# Altium PCB 温控.PcbDoc
Units mm, origin at the board's own origin, x right, y up, seen from the top; angles counter-clockwise.
Board outline 152.4 x 101.6 mm, 2 copper layers (Top Layer, Bottom Layer); 30 components, 29 nets, 132 pads, 31 vias.
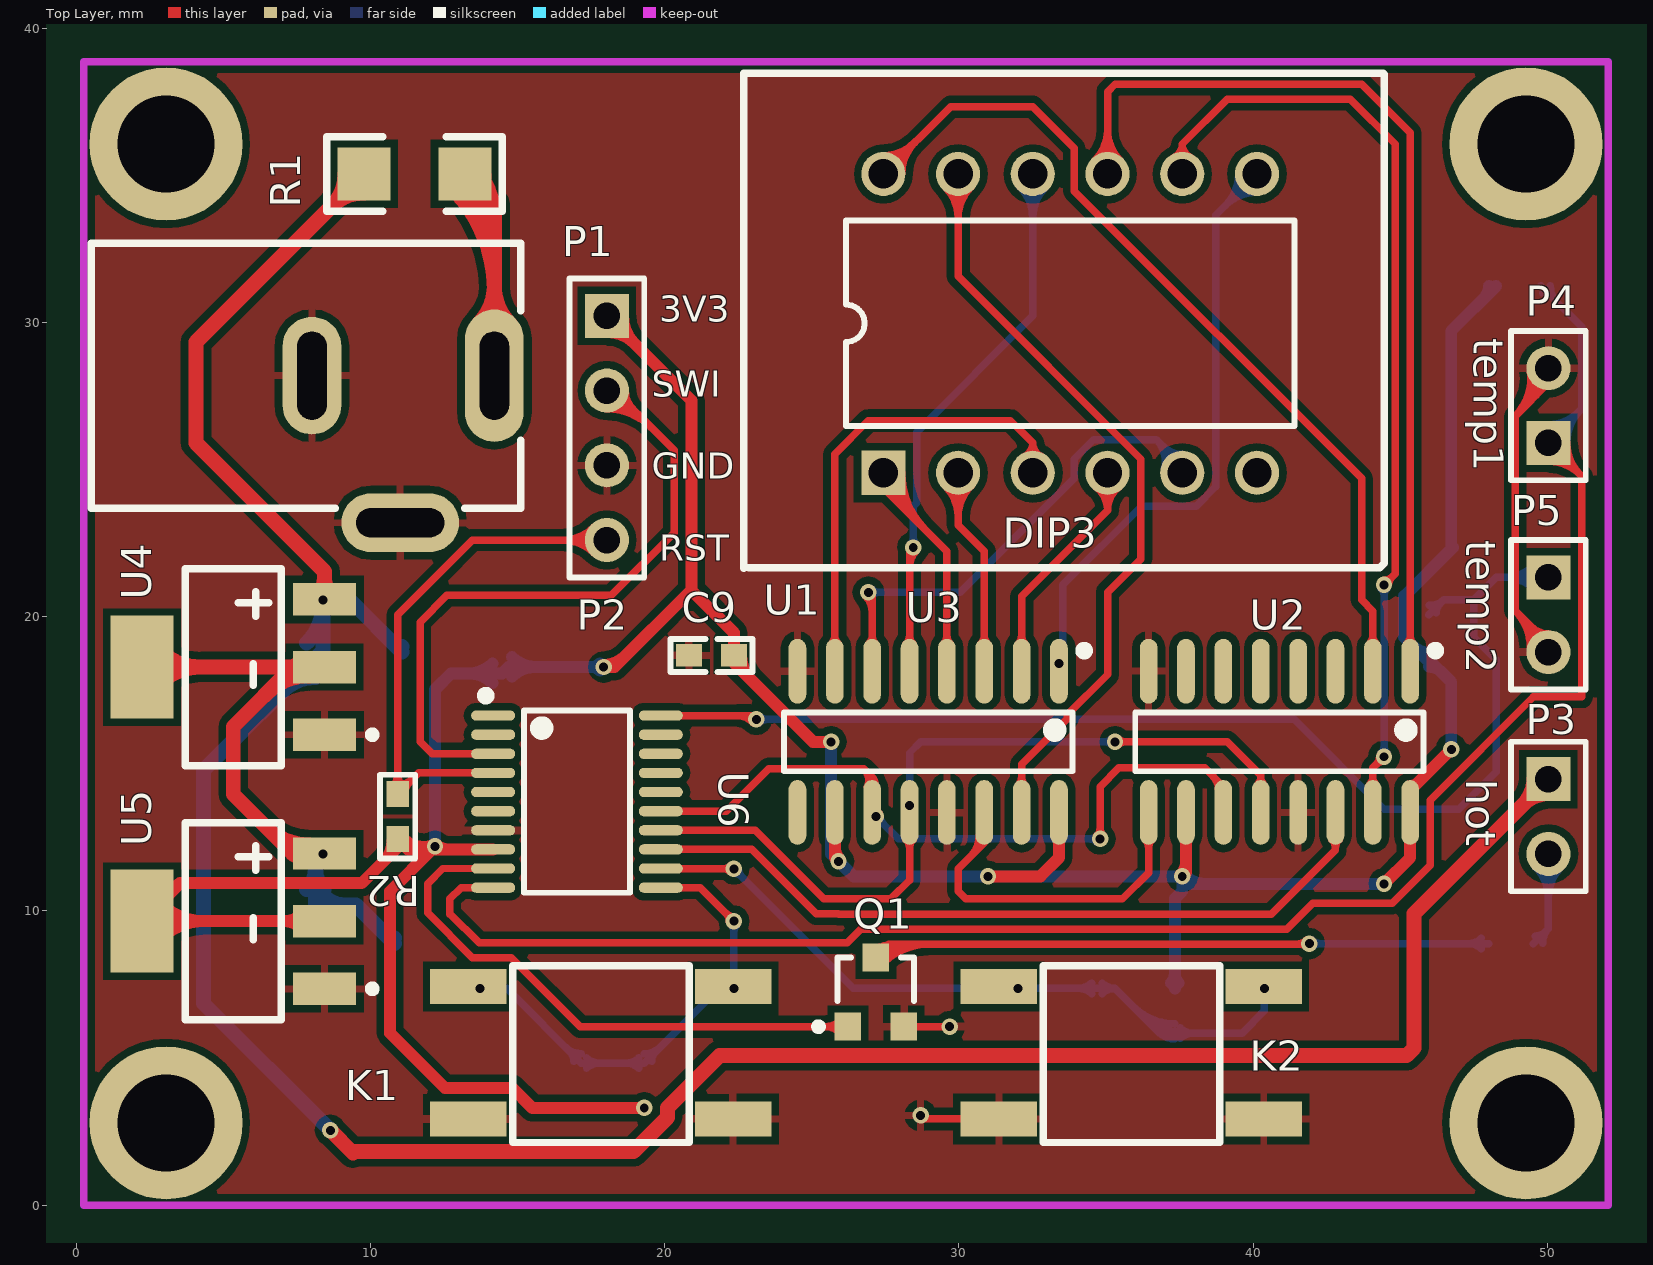
[diagram p0: Top Layer view]
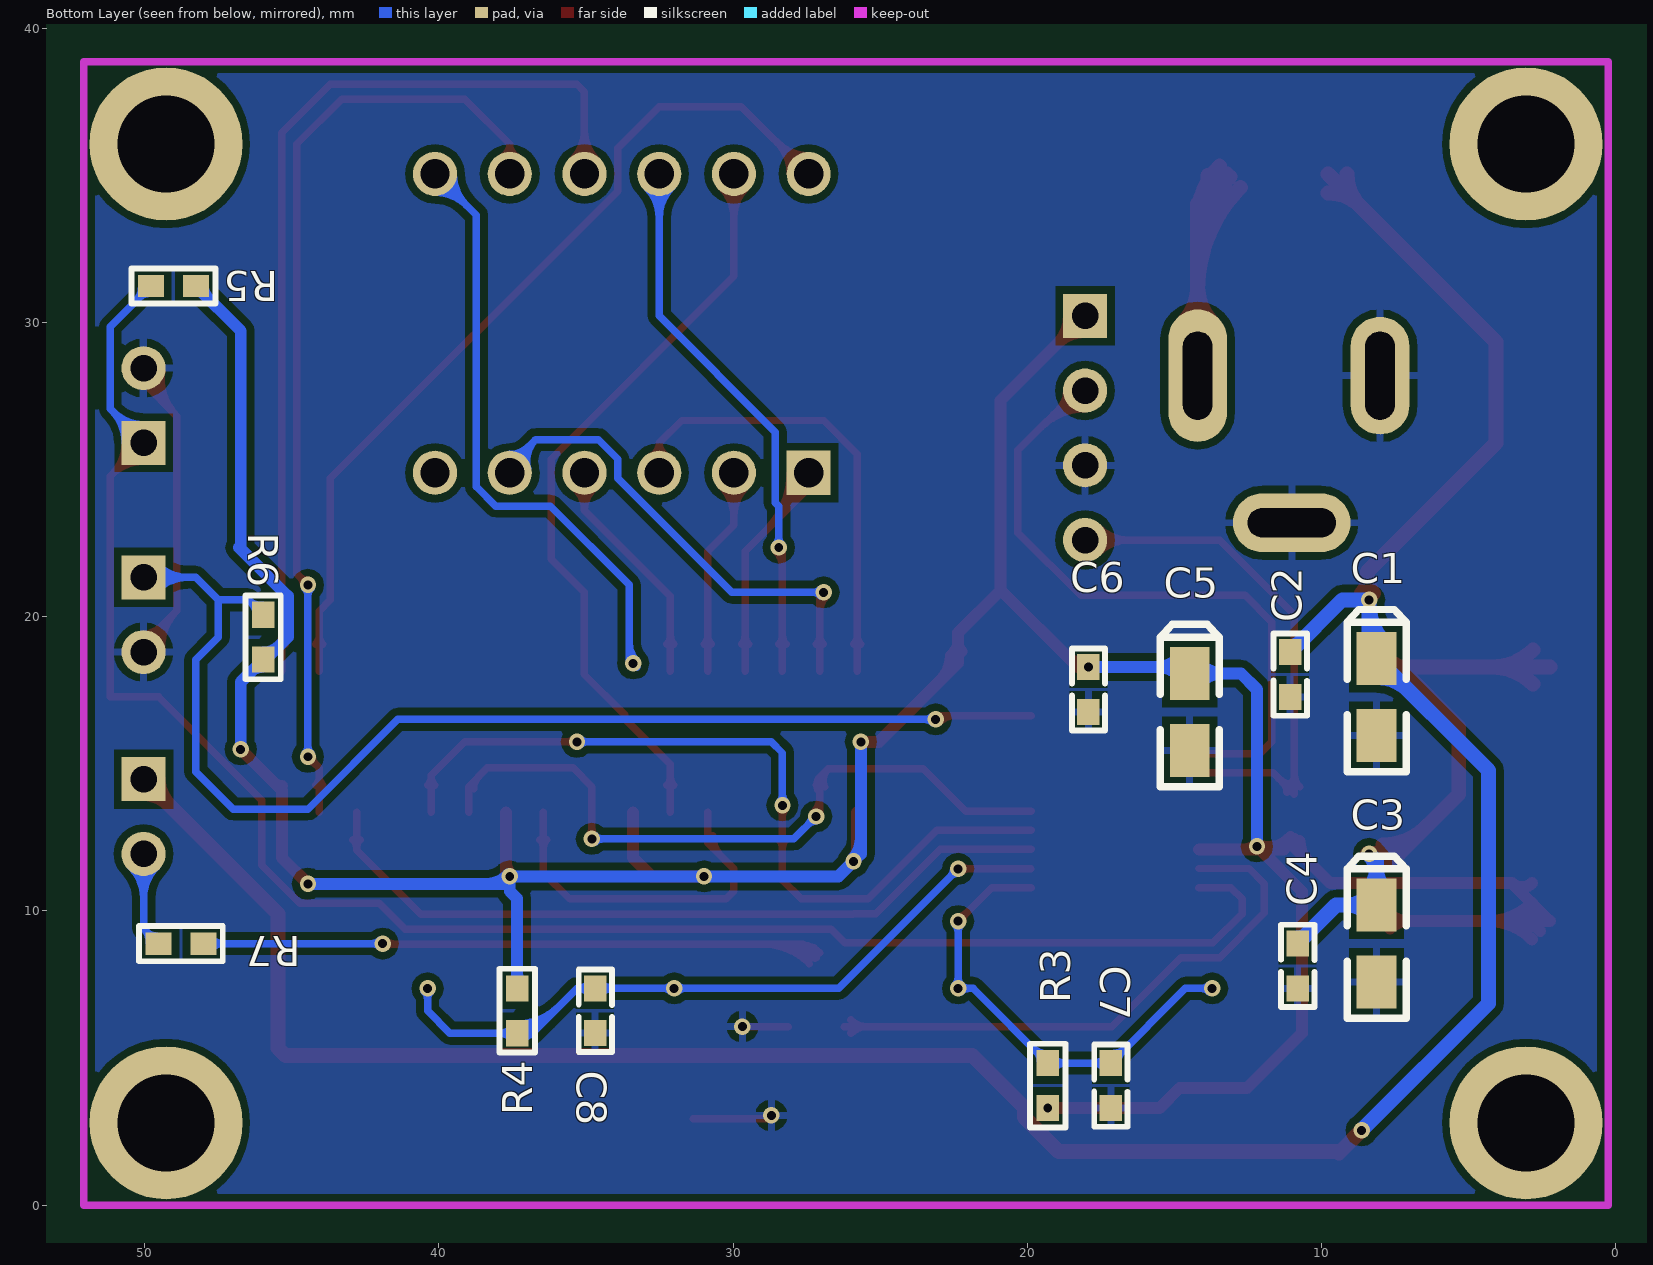
[diagram p1: Bottom Layer view, seen from below]

## Layer stack, top to bottom
Top Layer: signal copper 0.0356
Dielectric: dielectric 0.32, FR-4, Dk 4.8
Bottom Layer: signal copper 0.0356

## Board outline
-16.129,-10.414 136.271,-10.414 136.271,91.186 -16.129,91.186

## Design rules (kind name [scope] priority, off if disabled: settings)
Clearance [All] p1: gap=0.254
HoleToHoleClearance [All] p1: gap=0 allowstackedmicrovias=TRUE
MinimumSolderMaskSliver [All] p1: minsoldermaskwidth=0
PolygonConnect [All] p1: connectstyle=Relief reliefconductorwidth=0.254 reliefentries=4 polygonreliefangle="90 Angle" airgapwidth=0.254
RoutingVias [All] p1: holewidth=0.305 width=0.559 viastyle="Through Hole" minholewidth=0.305 minwidth=0.559 maxholewidth=0.305 maxwidth=0.559
SilkToSilkClearance [All] p1: silktosilkclearance=0
SilkToSolderMaskClearance [IsPad] p1: minsilkscreentomaskgap=0 clearancetoexposedcopper=TRUE
SolderMaskExpansion [All] p1: expansion=0.102
Width D12V0 [InNet('D12V0')] p1: maxlimit=1.016 minlimit=0.508 preferedwidth=0.762
Width D3V3 [InNet('D3V3')] p2: maxlimit=0.762 minlimit=0.406 preferedwidth=0.508
Width [All] p3: maxlimit=0.762 minlimit=0.254 preferedwidth=0.254
24 further rules are at their usual default settings.

## Classes and differential pairs
component class 温控: C1 C2 C3 C4 C5 C6 C7 C8 C9 K1 K2 P1 P2 P3 P4 P5 Q1 R1 R2 R3 R4 R5 R6 R7 U4 U5 U6
component class 显示: U1 U2 U3

## Components (designator, comment, footprint, x,y, rotation, side; value= is the part's Value field where it differs from the comment)
C1 "CAP" A_3216 8.128,17.272 r90 bottom
C2 "Cap" 0603_cap 11.176,18.034 r90 bottom
C3 "CAP" A_3216 8.128,8.89 r90 bottom
C4 "Cap" 0603_cap 10.922,8.128 r90 bottom
C5 "CAP" A_3216 14.478,16.764 r90 bottom
C6 "Cap" 0603_cap 18.034,17.526 r90 bottom
C7 "Cap" 0603_cap 17.272,4.064 r90 bottom
C8 "Cap" 0603_cap 34.798,6.604 r90 bottom
C9 "Cap" 0603_cap 21.59,18.796 r0 top
K1 "KEY_4" KEY6*6 20.828,8.128 r180 top
K2 "KEY_4" KEY6*6 38.862,8.128 r180 top
P1 "SOURCE" source 0.508,28.194 r0 top
P2 "STLINK" HDR1X4 18.034,30.226 r270 top
P3 "RHOT" HDR1X2 50.038,14.478 r270 top
P4 "TEMP1" HDR1X2 50.038,25.908 r90 top
P5 "TEMP1" HDR1X2 50.038,21.336 r270 top
Q1 "S8050" SOT-23R 27.178,7.112 r0 top
R1 "0" 1206 13.208,35.052 r180 top
R2 "103" 0603 10.922,13.97 r270 top
R3 "103" 0603 19.304,4.826 r270 bottom
R4 "103" 0603 37.338,5.842 r90 bottom
R5 "103" 0603 49.784,31.242 r180 bottom
R6 "103" 0603 45.974,20.066 r270 bottom
R7 "0" 0603 48.006,8.89 r0 bottom
U1 "DIP3" DIP3 27.432,24.892 r90 top
U2 "74HC595" LC-SOP-16_150mil 40.894,15.748 r180 top
U3 "74HC595" LC-SOP-16_150mil 28.956,15.748 r180 top
U4 "AMS1117-5.0" SOT223 5.334,18.288 r90 top
U5 "AMS1117-3.3" SOT223 5.334,9.652 r90 top
U6 "STM8L051F3P6" LC-TSSOP-20 17.018,13.716 r270 top

## Footprints (in the part's own frame and the unit in brackets; to place one, negate y for a bottom-side part, rotate by r counter-clockwise, add the part's x,y. Pads: shape width x height; smd on the part's side, far side on the other; paste and mask are expansions set on the pad)
0603 [mil]
  rect 35x30 smd: 1(0,0) 2(60,0)
  silkscreen extent -26,-24 86,24, body extent -22,-19 82,19, height 39
0603_cap [mil]
  rect 35x30 smd: 1(-29.92,-4.33) 2(30.08,-4.33)
  silkscreen extent -55,-27 55,18
1206 [mm]
  rect 1.8x1.8 smd: 1(0,0) 2(3.429,0)
  silkscreen extent -1.27,-1.27 4.7,1.27
A_3216 [mm]
  rect 1.8x1.35 smd: 1(1.31,0) 2(-1.31,0)
  silkscreen extent -2.54,-1 2.97,1, body extent -1.7,-0.84 1.7,0.84, height 1.71
DIP3 [mm]
  rect 1.5x1.5 hole 1: 1(0,0)
  round 1.5 hole 1: 2(0,-2.54) 3(0,-5.08) 4(0,-7.62) 5(0,-10.16) 6(0,-12.7) 7(10.16,-12.7) 8(10.16,-10.16) 9(10.16,-7.62) 10(10.16,-5.08) 11(10.16,-2.54) 12(10.16,0)
  silkscreen extent -3.25,-17.03 13.57,4.75
HDR1X2 [mm]
  rect 1.5x1.5 hole 0.9: 1(0,0)
  round 1.5 hole 0.9: 2(2.54,0)
  silkscreen extent -1.27,-1.27 3.81,1.27
HDR1X4 [mm] "Connector; Header; 4 Position"
  rect 1.5x1.5 hole 0.9: 1(0,0)
  round 1.5 hole 0.9: 2(2.54,0) 3(5.08,0) 4(7.62,0)
  silkscreen extent -1.27,-1.27 8.89,1.27
KEY6*6 [mm]
  rect 2.6x1.2 smd: 1(-1.5,5.2) 1(7.5,5.2) 2(-1.5,0.7) 2(7.5,0.7)
  silkscreen extent 0,0 6,6
LC-SOP-16_150mil [mm]
  oval 0.6x2.2 smd: 1(-4.445,-2.4) 2(-3.175,-2.4) 3(-1.905,-2.4) 4(-0.635,-2.4) 5(0.635,-2.4) 6(1.905,-2.4) 7(3.175,-2.4) 8(4.445,-2.4) 9(4.445,2.4) 10(3.175,2.4) 11(1.905,2.4) 12(0.635,2.4) 13(-0.635,2.4) 14(-1.905,2.4) 15(-3.175,2.4) 16(-4.445,2.4)
  silkscreen extent -5.45,-3.25 4.9,1
LC-TSSOP-20 [mm]
  oval 0.35x1.5 smd: 1(-2.925,-2.85) 2(-2.275,-2.85) 3(-1.625,-2.85) 4(-0.975,-2.85) 5(-0.325,-2.85) 6(0.325,-2.85) 7(0.975,-2.85) 8(1.625,-2.85) 9(2.275,-2.85) 10(2.925,-2.85) 11(2.925,2.85) 12(2.275,2.85) 13(1.625,2.85) 14(0.975,2.85) 15(0.325,2.85) 16(-0.325,2.85) 17(-0.975,2.85) 18(-1.625,2.85) 19(-2.275,2.85) 20(-2.925,2.85)
  silkscreen extent -3.75,-3.25 3.1,1.8
SOT223 [mm]
  rect 1.1x2.15 smd: 1(-2.3,-3.1) 2(0,-3.1) 3(2.3,-3.1)
  rect 3.5x2.15 smd: 2(0,3.1)
  silkscreen extent -3.35,-4.85 3.35,1.62, body extent -3.35,-1.62 3.35,1.62, height 1
SOT-23R [mm]
  rect 0.9x0.95 smd: 1(0.95,-1.048) 2(-0.95,-1.048) 3(0,1.302)
  silkscreen extent -2.07,-1.17 1.3,1.3
source [mm] "DC Power Jack, 2.5mm, KLD Series, PCB Mount"
  oval 2x4.5 hole 1 slot 3 at 90 deg: 1(13.7,0)
  oval 2x4 hole 1 slot 3 at 90 deg: 2(7.5,0)
  oval 4x2 hole 1 slot 3 at 0 deg: 3(10.5,-5)
  silkscreen extent 0,-4.5 14.6,4.5, body extent -0.13,-4.63 14.73,4.63, height 6

## Part data
C1 C3 C5: library part CAP2
C2 C4 C6 C7 C8 C9: "Capacitor"
K1 K2: "Switch"
P2: library part "Header 4", "Header, 4-Pin"
P3 P4 P5: library part "Header 2", "Header, 2-Pin"
Q1: library part NPN, "8050/BCW846/BCW847"
R1 R2 R3 R4 R5 R6 R7: library part RES, "Resistor"
U4 U5: library part AMS1117, "3.3V电压转换器AMS1117"

## Free pads (board coordinates)
  round 5.2 hole 3.3: 0(3.048,36.068) 1(3.048,2.794) 2(49.276,36.068) 3(49.276,2.794)

## Via types
v1: diameter 0.559, hole 0.305, Top Layer to Bottom Layer, 31 vias

## Nets (pads, with @x,y where several pads share a name; then routed paths per layer and width w, separated by ;. In a path a pad name is that pad's centre, name@x,y a point inside that pad or via, vN(x,y) a via of type N, cw(c..) or ccw(c..) an arc to the next point about the centre after c; other vN are vias at no path point)
A: U1.11 U3.15 | length 30.4
  Top Layer w0.254: U1.11@29.531,34.611 cw(c28.468,33.548) 29.972,33.548 cw(c31.476,33.548) U1.11@30.413,34.611 ; U1.11@29.711,34.791 cw(c29.081,34.161) 29.972,34.161 cw(c30.863,34.161) U1.11@30.233,34.791 ; U1.11 29.972,31.571 36.183,25.36 36.183,21.959 35.052,20.828 35.052,18.036 33.683,16.667 33.683,16.538 32.131,14.986 U3.15 ; U3.15@32.009,14.27 ccw(c31.713,14.566) 32.131,14.566 ccw(c32.549,14.566) U3.15@32.253,14.27
B: U1.7 U3.1 | length 25.1
  Bottom Layer w0.254: v1@33.274,18.288 33.528,18.542 33.528,21.082 36.207,23.761 38.06,23.761 38.723,24.424 38.723,33.643 U1.7 ; v1@33.293,18.523 ccw(c32.726,19.09) 33.528,19.09 ; U1.7@39.509,35.052 cw(c38.005,35.052) 39.068,33.988 cw(c40.132,32.925) U1.7@40.132,34.429 ; U1.7@39.763,35.052 cw(c38.872,35.052) 39.502,34.422 cw(c40.132,33.792) U1.7@40.132,34.683
  other v1: 33.401,18.415
C: U1.4 U3.2 | length 11.5
  Top Layer w0.254: U3.2@32.009,19.07 ccw(c31.713,19.366) 32.131,19.366 ccw(c32.549,19.366) U3.2@32.253,19.07 ; U3.2 32.131,20.701 35.052,23.622 ; U1.4@34.671,24.399 cw(c34.069,23.622) 35.052,23.622 ; U1.4@34.826,24.6 cw(c34.47,24.14) 35.052,24.14 cw(c35.634,24.14) U1.4@35.278,24.6 ; U1.4 35.052,23.622 ; U1.4@35.433,24.399 ccw(c36.035,23.622) 35.052,23.622
D: U1.2 U3.3 | length 11.5
  Top Layer w0.254: U1.2@29.531,24.451 cw(c28.468,23.388) 29.972,23.388 cw(c31.476,23.388) U1.2@30.413,24.451 ; U1.2@29.711,24.631 cw(c29.081,24.001) 29.972,24.001 cw(c30.863,24.001) U1.2@30.233,24.631 ; U1.2 29.972,23.114 30.861,22.225 U3.3 ; U3.3@30.739,19.07 ccw(c30.443,19.366) 30.861,19.366 ccw(c31.279,19.366) U3.3@30.983,19.07
D3V3: C5.1 C6.2 C9.2 P2.1 R2.2 R3.2 R4.2 R5.2 R6.2 U2.10 U2.16 U3.10 U3.16 U5.2 U6.8 | length 152.2
  Top Layer w0.406: U5.2@2.563,9.323 cw(c3.358,8.528) 3.358,9.652 cw(c3.358,10.776) U5.2@2.563,9.981 ; U5.2@2.85,9.036 cw(c4.339,7.547) 4.339,9.652 cw(c4.339,11.757) U5.2@2.85,10.268 ; U5.2@2.85,10.944 ccw(c3.188,11.284) 3.527,10.945 ; U5.2@7.664,9.407 ccw(c7.072,8.815) 7.072,9.652 ccw(c7.072,10.489) U5.2@7.664,9.897 ; U5.2@8.434,9.652 2.234,9.652 3.527,10.945 ; 10.467,11.714 ccw(c9.798,12.383) R2.2@10.744,12.383 ; R2.2@11.048,12.508 ccw(c12.055,13.515) v1@12.055,12.091 ; 11.67,12.194 ccw(c11.835,12.811) v1@12.154,12.258 ; 11.764,12.091 ccw(c11.764,12.62) v1@12.138,12.246 ; v1@12.246,12.246 ccw(c12.62,12.62) 12.62,12.091 ; U6.8 v1@12.091,12.091 ; v1(17.924,18.29) 18.29,18.29 20.904,20.904 ; v1@17.924,18.366 ccw(c17.924,19.434) 18.679,18.679 ; P2.1@18.034,29.679 cw(c18.034,28.359) 18.967,29.293 cw(c19.901,30.226) P2.1@18.581,30.226 ; P2.1 20.904,27.356 20.904,20.904 ; v1(19.304,3.302) 15.501,3.302 14.817,3.985 12.525,3.985 10.668,5.842 10.668,10.668 v1@12.091,12.091 ; C9.2@22.228,18.812 ccw(c21.925,19.115) 22.354,19.115 ccw(c22.783,19.115) C9.2@22.48,18.812 ; C9.2@22.595,18.686 ccw(c23.786,18.686) 22.944,17.844 ; v1(25.654,15.748) 25.04,15.748 22.354,18.434 C9.2 22.354,19.454 20.904,20.904 ; 25.781,12.175 ccw(c26.399,12.175) v1@25.962,11.738 ; U3.10 25.781,11.811 v1(25.908,11.684) ; v1(30.988,11.176) 32.766,11.176 33.401,11.811 U3.16 ; v1@37.538,11.23 ccw(c37.101,11.667) 37.719,11.667 ; v1(37.592,11.176) 37.719,11.303 U2.10 ; v1(44.45,10.922) 45.339,11.811 U2.16 45.339,14.097 v1(46.736,15.494) ; U2.16@45.339,14.245 ccw(c45.339,14.602) 45.591,14.349 ; 3.527,10.945 9.698,10.945 10.922,12.168 R2.2 11.277,12.091 v1@12.091,12.091
  Bottom Layer w0.406: v1(12.192,12.192) 12.192,17.526 12.74,18.074 C5.1 14.694,18.29 v1(17.924,18.29) ; C5.1@14.144,17.74 ccw(c13.339,16.935) 13.339,18.074 ccw(c13.339,19.213) C5.1@14.144,18.408 ; C5.1@14.812,17.965 cw(c15.595,17.182) 15.595,18.29 ; C5.1@14.812,18.633 ccw(c15.639,19.46) 15.639,18.29 ; C6.2@17.798,18.164 ccw(c17.495,17.861) 17.495,18.29 ccw(c17.495,18.719) C6.2@17.798,18.416 ; 25.654,12.481 ccw(c26.705,12.481) v1@25.962,11.738 ; v1(25.654,15.748) 25.654,11.938 v1(25.908,11.684) 26.416,11.176 v1(30.988,11.176) v1(37.592,11.176) ; R4.2@37.212,7.555 ccw(c36.909,7.859) 37.338,7.859 ccw(c37.767,7.859) R4.2@37.464,7.555 ; R4.2 37.338,10.414 37.592,10.668 v1(37.592,11.176) ; v1@37.646,11.23 ccw(c38.389,11.973) 38.389,10.922 ; v1(44.45,10.922) 37.846,10.922 v1(37.592,11.176) ; 45.432,19.008 ccw(c45.974,19.55) R6.2@45.974,18.783 ; R6.2@45.974,18.301 cw(c45.974,17.718) 46.386,18.13 ; v1(46.736,15.494) 46.736,17.78 R6.2 45.898,18.542 45.136,19.304 45.136,20.7 46.788,22.352 46.736,22.404 46.736,29.718 R5.2 ; 47.848,30.83 ccw(c47.436,31.242) R5.2@48.019,31.242
D12V0: C1.1 C2.2 P3.1 R1.2 U4.3 | length 102.4
  Top Layer w0.508: U4.3@8.225,20.797 ccw(c7.719,21.303) 8.434,21.303 ccw(c9.149,21.303) U4.3@8.643,20.797 ; U4.3@8.338,20.994 ccw(c8.619,20.831) U4.3@8.399,20.593 ; U4.3 8.434,21.538 4.064,25.908 4.064,29.337 R1.2 ; v1(8.636,2.54) 9.398,1.778 9.44,1.82 18.936,1.82 20.091,2.976 20.091,3.31 21.863,5.081 45.213,5.081 45.466,5.334 45.466,9.906 P3.1 ; R1.2@9.133,35.052 cw(c7.573,35.052) 8.676,33.949 cw(c9.779,32.846) R1.2@9.779,34.406 ; P3.1@49.542,14.478 cw(c48.345,14.478) 49.191,13.631 cw(c50.038,12.785) P3.1@50.038,13.982
  Bottom Layer w0.508: 7.025,17.479 cw(c8.128,16.376) C1.1@8.128,17.936 ; C1.1@7.83,19.105 ccw(c6.498,20.437) v1@8.382,20.437 ; v1(8.636,2.54) 4.318,6.858 4.318,14.772 C1.1 8.382,18.836 v1(8.382,20.574) 9.29,20.574 C2.2 ; C2.2@10.741,19.123 ccw(c11.066,19.448) C2.2@11.066,18.988
DIG0: U1.8 U2.15 | length 36.7
  Top Layer w0.254: U1.8@37.309,35.607 ccw(c37.075,36.068) 37.592,36.068 ; U1.8 37.592,36.068 ; U1.8@37.875,35.607 cw(c38.109,36.068) 37.592,36.068 ; U2.15@43.947,14.27 ccw(c43.651,14.566) 44.069,14.566 ccw(c44.487,14.566) U2.15@44.191,14.27 ; U2.15 44.069,14.859 v1(44.45,15.24) ; v1@44.298,15.24 cw(c43.93,15.24) 44.19,14.98 cw(c44.45,14.72) v1@44.45,15.088 ; v1(44.45,21.082) 44.831,21.463 44.831,36.068 43.307,37.592 39.116,37.592 37.592,36.068 ; v1@44.45,21.234 ccw(c44.45,21.602) 44.71,21.342 ccw(c44.97,21.082) v1@44.602,21.082
  Bottom Layer w0.254: v1@44.342,15.348 ccw(c44.082,15.608) 44.45,15.608 ccw(c44.818,15.608) v1@44.558,15.348 ; v1@44.342,20.974 cw(c44.082,20.714) 44.45,20.714 cw(c44.818,20.714) v1@44.558,20.974 ; v1(44.45,15.24) v1(44.45,21.082)
DIG1: U1.9 U2.1 | length 36.6
  Top Layer w0.254: U1.9@34.611,35.493 ccw(c33.548,36.556) 35.052,36.556 ccw(c36.556,36.556) U1.9@35.493,35.493 ; U1.9@34.791,35.313 ccw(c34.161,35.943) 35.052,35.943 ccw(c35.943,35.943) U1.9@35.313,35.313 ; U1.9 35.052,37.846 35.306,38.1 43.688,38.1 45.339,36.449 U2.1 ; U2.1@45.217,19.07 ccw(c44.921,19.366) 45.339,19.366 ccw(c45.757,19.366) U2.1@45.461,19.07
DIG2: U1.12 U2.2 | length 34.4
  Top Layer w0.254: U1.12 29.718,37.338 32.512,37.338 33.921,35.929 33.921,34.469 43.688,24.702 43.688,20.574 44.069,20.193 U2.2 ; U1.12@27.432,35.421 ccw(c27.432,36.312) 28.062,35.682 ccw(c28.692,35.052) U1.12@27.801,35.052 ; U1.12@27.432,35.675 ccw(c27.432,37.179) 28.496,36.116 ccw(c29.559,35.052) U1.12@28.055,35.052 ; U2.2@43.947,19.07 ccw(c43.651,19.366) 44.069,19.366 ccw(c44.487,19.366) U2.2@44.191,19.07
DIO: U2.14 U6.13 | length 26.7
  Top Layer w0.254: U6.13 22.961,12.091 25.146,9.906 25.891,9.906 25.908,9.889 40.623,9.889 42.799,12.065 U2.14 ; U2.14@42.677,12.426 cw(c42.381,12.13) 42.799,12.13 cw(c43.217,12.13) U2.14@42.921,12.426
E: U1.1 U3.4 | length 13.3
  Top Layer w0.254: U1.1 27.432,24.384 29.591,22.225 U3.4 ; U1.1@27.547,24.892 ccw(c29.051,24.892) 27.988,23.828 ; U1.1@27.801,24.892 ccw(c29.918,24.892) 28.421,23.395 ; U1.1@28.055,24.892 ccw(c30.785,24.892) 28.855,22.961 ; U3.4@29.469,19.07 ccw(c29.173,19.366) 29.591,19.366 ccw(c30.009,19.366) U3.4@29.713,19.07
F: U1.10 U3.5 | length 24.3
  Top Layer w0.254: U3.5@28.199,19.07 ccw(c27.903,19.366) 28.321,19.366 ccw(c28.739,19.366) U3.5@28.443,19.07 ; U3.5 28.321,22.225 v1(28.448,22.352) ; 28.321,21.677 cw(c29.123,21.677) v1@28.556,22.244
  Bottom Layer w0.254: v1@28.34,22.46 ccw(c28.08,22.72) 28.448,22.72 ccw(c28.816,22.72) v1@28.556,22.46 ; v1(28.448,22.352) 28.448,23.754 28.563,23.869 28.563,26.277 32.512,30.226 U1.10 ; U1.10@32.071,34.611 cw(c31.008,33.548) 32.512,33.548 cw(c34.016,33.548) U1.10@32.953,34.611 ; U1.10@32.251,34.791 cw(c31.621,34.161) 32.512,34.161 cw(c33.403,34.161) U1.10@32.773,34.791
G: U1.5 U3.6 | length 21
  Top Layer w0.254: v1@26.816,20.72 cw(c26.249,20.153) 27.051,20.153 ; v1(26.924,20.828) 27.051,20.701 U3.6 ; U3.6@26.929,19.07 ccw(c26.633,19.366) 27.051,19.366 ccw(c27.469,19.366) U3.6@27.173,19.07
  Bottom Layer w0.254: v1(26.924,20.828) 30.047,20.828 33.921,24.702 33.921,25.36 34.584,26.023 36.715,26.023 ; v1@27.032,20.72 cw(c27.292,20.46) 27.292,20.828 cw(c27.292,21.196) v1@27.032,20.936 ; 36.962,25.776 ccw(c37.592,26.406) U1.5@37.592,25.515 ; U1.5@36.987,25.042 ccw(c35.984,25.292) 36.715,26.023 ; 37.033,25.705 cw(c36.493,25.165) U1.5@37.234,24.981 ; U1.5 37.592,25.146 36.715,26.023
GND: C1.2 C2.1 C3.2 C4.1 C5.2 C6.1 C7.1 C8.1 C9.1 K1.1 K2.1 P1.2 P1.3 P2.3 P4.2 P5.2 Q1.1 U2.8 U2.13 U3.8 U3.13 U4.1 U5.1 U6.7 | length 22.1
  Top Layer w0.254: Q1.1 v1(29.686,6.064) v1@29.718,6.096 ; v1(28.702,3.048) 28.822,2.928 K2.1@31.362,2.928 ; 48.907,26.816 ccw(c47.621,28.102) P4.2@49.421,28.36 ; 49.266,27.175 ccw(c48.249,28.192) P4.2@49.673,28.396 ; 49.301,19.811 cw(c48.401,18.912) P5.2@49.67,18.822 ; P5.2@49.417,18.84 ccw(c47.666,18.964) 48.907,20.205 ; 49.449,19.663 ccw(c50.038,20.252) P5.2@50.038,19.419 ; 49.625,27.534 ccw(c48.877,28.282) P4.2@49.924,28.432 ; P5.2 50.038,19.074 48.907,20.205 ; P4.2 50.038,27.947 48.907,26.816 48.907,20.205
H: U1.3 U3.7 | length 17.7
  Top Layer w0.254: U3.7@25.659,19.07 ccw(c25.363,19.366) 25.781,19.366 ccw(c26.199,19.366) U3.7@25.903,19.07 ; U3.7 25.781,25.527 26.924,26.67 31.75,26.67 32.512,25.908 ; U1.3@32.229,25.447 ccw(c31.995,25.908) 32.512,25.908 ; U1.3 32.512,25.908 ; U1.3@32.795,25.447 cw(c33.029,25.908) 32.512,25.908
KEY1: C7.2 K1.2 R3.1 U6.11 | length 22.7
  Top Layer w0.254: U6.11 21.213,10.791 v1(22.352,9.652) ; v1@22.2,9.652 ccw(c21.832,9.652) 22.092,9.912 ccw(c22.352,10.172) v1@22.352,9.804
  Bottom Layer w0.254: v1(13.716,7.366) 14.624,7.366 C7.2 19.302,4.828 R3.1 21.844,7.366 v1(22.352,7.366) v1(22.352,9.652) ; v1@13.824,7.258 cw(c14.084,6.998) 14.084,7.366 cw(c14.084,7.734) v1@13.824,7.474 ; 16.62,5.37 ccw(c17.162,5.912) C7.2@17.162,5.145 ; 16.773,5.217 cw(c16.448,4.891) C7.2@16.908,4.891 ; C7.2@17.342,4.648 cw(c17.775,4.215) 17.775,4.828 cw(c17.775,5.441) C7.2@17.342,5.008 ; 18.686,4.828 cw(c18.686,4.208) R3.1@19.124,4.646 ; 18.696,4.828 ccw(c18.696,5.434) R3.1@19.124,5.006 ; R3.1@19.304,5.143 ccw(c19.304,5.91) 19.846,5.368 ; R3.1@19.558,4.889 cw(c20.018,4.889) 19.693,5.215 ; v1@22.244,7.258 ccw(c21.984,6.998) 21.984,7.366 ccw(c21.984,7.734) 22.244,7.474 ccw(c21.984,7.734) 22.352,7.734 ccw(c22.72,7.734) v1@22.46,7.474 ; v1@22.244,9.544 cw(c21.984,9.284) 22.352,9.284 cw(c22.72,9.284) v1@22.46,9.544
KEY2: C8.2 K2.2 R4.1 U6.12 | length 33.6
  Top Layer w0.254: U6.12@19.879,11.43 v1(22.352,11.43) ; v1@22.244,11.322 ccw(c21.984,11.062) 21.984,11.43 ccw(c21.984,11.798) v1@22.244,11.538
  Bottom Layer w0.254: v1@22.352,11.278 cw(c22.352,10.91) 22.612,11.17 cw(c22.872,11.43) v1@22.504,11.43 ; v1(22.352,11.43) 26.414,7.368 v1(32.002,7.368) C8.2 35.304,7.368 36.83,5.842 ; v1@31.894,7.26 ccw(c31.634,7) 31.634,7.368 ccw(c31.634,7.736) v1@31.894,7.476 ; v1@32.11,7.26 cw(c32.37,7) 32.37,7.368 cw(c32.37,7.736) v1@32.11,7.476 ; C8.2@34.508,7.188 ccw(c34.075,6.755) 34.075,7.368 ccw(c34.075,7.981) C8.2@34.508,7.548 ; C8.2@34.868,7.188 cw(c35.301,6.755) 35.301,7.368 cw(c35.301,7.981) C8.2@34.868,7.548 ; 35.929,6.743 ccw(c37.338,8.152) R4.1@37.338,6.159 ; 36.362,6.31 ccw(c37.338,7.285) R4.1@37.338,5.905 ; 36.796,5.876 ccw(c37.338,6.418) R4.1@37.338,5.651 ; R4.1@37.135,5.69 ccw(c36.83,5.461) 36.83,5.842 ; R4.1@37.135,5.994 cw(c36.83,6.223) 36.83,5.842 ; R4.1@37.518,5.662 cw(c37.951,5.229) 37.951,5.842 cw(c37.951,6.455) R4.1@37.518,6.022 ; v1@40.278,7.258 cw(c40.018,6.998) 40.386,6.998 cw(c40.754,6.998) v1@40.494,7.258 ; v1(40.386,7.366) 40.386,6.604 39.624,5.842 R4.1 36.83,5.842
NetC3_1: C3.1 C4.2 U4.2 U5.3 | length 34.1
  Top Layer w0.508: U4.2@2.234,18.288 U4.2@7.366,18.288 ; U4.2@2.815,17.707 cw(c4.216,16.306) 4.216,18.288 cw(c4.216,20.27) U4.2@2.815,18.869 ; 6.453,12.851 ccw(c7.909,14.307) U5.3@7.909,12.248 ; 6.477,17.399 cw(c7.909,15.966) U4.2@7.909,17.992 ; 7.32,11.984 ccw(c7.909,12.573) U5.3@7.909,11.74 ; 7.344,18.266 cw(c7.909,17.701) U4.2@7.909,18.5 ; U5.3@7.664,11.786 ccw(c7.352,11.576) 7.352,11.952 ; U5.3@7.664,12.118 cw(c7.352,12.328) 7.352,11.952 ; U4.2@7.7,18.079 ccw(c7.194,17.573) 7.194,18.288 ccw(c7.194,19.003) U4.2@7.7,18.497 ; U5.3 7.352,11.952 ; U4.2@8.434,18.288 U4.2@7.366,18.288 ; 7.352,11.952 5.334,13.97 5.334,16.256 U4.2@7.366,18.288
  Bottom Layer w0.508: C3.1@7.83,10.723 ccw(c7.112,11.441) 8.128,11.441 ccw(c9.144,11.441) C3.1@8.426,10.723 ; 8.128,11.263 cw(c9.057,11.263) v1@8.4,11.92 ; v1(8.382,11.938) 8.128,11.684 C3.1 9.504,10.2 C4.2 ; C3.1@8.426,9.902 cw(c9.144,9.184) 9.144,10.2 cw(c9.144,11.216) C3.1@8.426,10.498 ; C4.2@10.487,9.217 ccw(c10.812,9.542) C4.2@10.812,9.082
NetP1_1: P1.1 R1.1 | length 21
  Top Layer w0.508: R1.1@12.751,34.595 cw(c9.234,31.078) 14.208,31.078 ; R1.1@13.11,34.954 cw(c10.461,32.305) 14.208,32.305 ; R1.1 14.208,34.052 ; R1.1@13.254,34.408 cw(c13.342,33.186) 14.208,34.052 ; R1.1@13.47,35.314 cw(c11.687,33.531) 14.208,33.531 ; P1.1@13.68,29.972 ccw(c12.407,31.245) 14.208,31.245 ccw(c16.009,31.245) P1.1@14.736,29.972 ; R1.1@13.852,35.006 ccw(c15.074,34.918) 14.208,34.052 ; P1.1 14.208,34.052
NetP3_2: P3.2 R7.2 | length 7.9
  Bottom Layer w0.254: R7.2 50.038,9.398 ; R7.2@49.593,9.144 ccw(c49.593,9.604) 49.919,9.279 ; P3.2@49.597,11.497 cw(c48.534,10.434) 50.038,10.434 cw(c51.542,10.434) P3.2@50.479,11.497 ; P3.2@49.777,11.677 cw(c49.147,11.047) 50.038,11.047 cw(c50.929,11.047) P3.2@50.299,11.677 ; R7.2@49.847,8.903 cw(c50.501,8.935) 50.038,9.398 ; P3.2 50.038,9.398
NetQ1_3: Q1.3 R7.1 | length 27.9
  Top Layer w0.254: Q1.3@27.047,8.57 cw(c27.78,7.837) 27.78,8.873 ; Q1.3 27.637,8.873 ; Q1.3@27.227,8.39 cw(c28.393,7.224) 28.393,8.873 ; Q1.3@27.243,8.755 ccw(c27.331,9.18) 27.637,8.873 ; Q1.3@27.406,8.211 cw(c29.007,6.611) 29.007,8.873 ; Q1.3@27.499,8.476 cw(c27.979,8.531) 27.637,8.873 ; 41.502,8.873 ccw(c41.502,9.298) v1@41.802,8.998 ; 41.582,8.873 cw(c41.582,8.562) v1@41.802,8.782 ; v1(41.91,8.89) 41.893,8.873 27.637,8.873
  Bottom Layer w0.254: v1(41.91,8.89) R7.1 ; v1@42.018,8.782 cw(c42.278,8.522) 42.278,8.89 cw(c42.278,9.258) v1@42.018,8.998 ; R7.1@47.763,8.71 ccw(c47.329,8.277) 47.329,8.89 ccw(c47.329,9.503) R7.1@47.763,9.07
NetU2_9: U2.9 U3.14 | length 13.5
  Top Layer w0.254: 30.404,11.862 ccw(c29.717,12.548) U3.14@30.688,12.548 ; U3.14 30.861,12.319 29.972,11.43 29.972,10.668 30.226,10.414 35.56,10.414 36.449,11.303 U2.9 ; U2.9@36.327,12.426 cw(c36.031,12.13) 36.449,12.13 cw(c36.867,12.13) U2.9@36.571,12.426
PD0: Q1.2 U6.9 | length 20.6
  Top Layer w0.254: U6.9 12.457,11.441 11.938,10.922 11.938,9.933 13.462,8.409 14.786,8.409 17.131,6.064 Q1.2 ; Q1.2@26,5.836 ccw(c25.448,5.284) 25.448,6.064 ccw(c25.448,6.844) Q1.2@26,6.292
RCLK: U2.12 U3.12 U6.14 | length 31.2
  Top Layer w0.254: U6.14 23.073,12.741 25.4,10.414 27.686,10.414 28.321,11.049 U3.12 ; U3.12@28.199,12.426 cw(c27.903,12.13) 28.321,12.13 cw(c28.739,12.13) U3.12@28.443,12.426 ; U3.12@28.213,13.481 cw(c27.953,13.221) 28.321,13.221 cw(c28.689,13.221) U3.12@28.429,13.481 ; v1(35.306,15.748) 39.116,15.748 40.259,14.605 U2.12 ; v1@35.414,15.64 cw(c35.674,15.38) 35.674,15.748 cw(c35.674,16.116) v1@35.414,15.856 ; U2.12@40.137,14.27 ccw(c39.841,14.566) 40.259,14.566 ccw(c40.677,14.566) U2.12@40.381,14.27
  Bottom Layer w0.254: v1@28.213,13.697 ccw(c27.953,13.957) 28.321,13.957 ccw(c28.689,13.957) v1@28.429,13.697 ; v1(28.321,13.589) 28.321,15.367 28.702,15.748 v1(35.306,15.748) ; v1@35.198,15.64 ccw(c34.938,15.38) 34.938,15.748 ccw(c34.938,16.116) v1@35.198,15.856
RESET: P2.4 R2.1 U6.4 | length 23.5
  Top Layer w0.254: R2.1@10.742,14.213 ccw(c10.309,14.647) 10.922,14.647 ccw(c11.535,14.647) R2.1@11.102,14.213 ; R2.1@10.922,14.287 ccw(c10.922,15.054) 11.464,14.512 ; R2.1@11.176,14.034 cw(c11.636,14.034) 11.311,14.359 ; U6.4 11.643,14.691 R2.1 10.922,20.066 13.462,22.606 P2.4 ; P2.4@17.593,22.165 ccw(c16.53,21.102) 16.53,22.606 ccw(c16.53,24.11) P2.4@17.593,23.047 ; P2.4@17.773,22.345 ccw(c17.143,21.715) 17.143,22.606 ccw(c17.143,23.497) P2.4@17.773,22.867
SCLK: U2.11 U3.11 U6.15 | length 29
  Top Layer w0.254: U6.15 22.098,13.391 23.536,14.829 26.767,14.829 ; U3.11@26.891,14.213 ccw(c26.366,14.428) 26.767,14.829 ; U3.11@26.933,14.275 ccw(c26.682,14.545) 27.051,14.545 ; 27.037,14.559 cw(c26.75,14.271) U3.11@27.126,14.117 ; U3.11 27.051,14.545 ; U3.11@27.051,13.883 ccw(c27.853,13.883) U3.11@27.286,13.316 ; U3.11@27.169,14.275 cw(c27.42,14.545) 27.051,14.545 ; v1@34.69,12.554 ccw(c34.43,12.814) 34.798,12.814 ccw(c35.166,12.814) v1@34.906,12.554 ; v1(34.798,12.446) 34.798,14.224 35.433,14.859 38.354,14.859 38.989,14.224 U2.11 ; 38.64,14.573 cw(c38.215,14.148) U2.11@38.816,14.148 ; 26.767,14.829 27.051,14.545
  Bottom Layer w0.254: v1@27.178,13.056 cw(c27.178,12.688) 27.438,12.948 cw(c27.698,13.208) v1@27.33,13.208 ; v1(27.178,13.208) 27.94,12.446 v1(34.798,12.446) ; v1@34.69,12.338 ccw(c34.43,12.078) 34.43,12.446 ccw(c34.43,12.814) v1@34.69,12.554
SWIM: P2.2 U6.3 | length 26.1
  Top Layer w0.254: U6.3 12.091,15.341 11.684,15.748 11.684,19.812 12.595,20.723 18.183,20.723 20.32,22.86 20.32,25.654 18.288,27.686 P2.2 ; P2.2@18.034,27.063 cw(c18.034,24.946) 19.531,26.443 ; P2.2@18.034,27.317 cw(c18.034,25.813) 19.098,26.876 ; P2.2@18.657,27.686 ccw(c19.548,27.686) 18.918,27.056
TEMP1: P4.1 R5.1 U6.10 | length 69.7
  Top Layer w0.254: U6.10 13.077,10.791 12.7,10.414 12.7,9.889 12.717,9.889 13.689,8.917 26.206,8.917 26.67,9.381 41.148,9.381 42.028,10.262 44.724,10.262 46.02,11.558 46.02,13.762 49.53,17.272 51.169,17.272 51.169,24.777 P4.1 ; P4.1@50.038,25.285 cw(c50.038,23.781) 51.102,24.844 cw(c52.165,25.908) P4.1@50.661,25.908 ; P4.1@50.038,25.539 cw(c50.038,24.648) 50.668,25.278 cw(c51.298,25.908) P4.1@50.407,25.908
  Bottom Layer w0.254: R5.1 51.169,29.857 51.169,27.063 50.038,25.932 P4.1 ; R5.1@49.847,30.988 cw(c49.847,30.528) 50.173,30.853 ; P4.1@50.038,26.277 ccw(c50.038,27.11) P4.1@50.627,26.521 ; P4.1@50.038,26.531 ccw(c50.038,27.977) 51.061,26.955 ; R5.1@50.102,31.242 ccw(c50.868,31.242) 50.326,30.7 ; P4.1@50.407,25.908 cw(c51.356,25.908) P4.1@50.685,26.579 ; P4.1@50.661,25.908 cw(c52.223,25.908) 51.118,27.012
TEMP2: P5.1 R6.1 U6.20 | length 46.9
  Top Layer w0.254: U6.20 22.983,16.641 v1(23.114,16.51) ; 22.43,16.641 cw(c22.43,15.826) v1@23.006,16.402
  Bottom Layer w0.254: v1(23.114,16.51) 41.402,16.51 44.45,13.462 46.99,13.462 48.26,14.732 48.26,18.542 47.498,19.304 47.498,20.574 ; v1@23.222,16.402 cw(c23.482,16.142) 23.482,16.51 cw(c23.482,16.878) v1@23.222,16.618 ; R6.1 46.482,20.574 ; R6.1@45.987,20.383 ccw(c46.019,21.037) 46.482,20.574 ; R6.1@46.228,20.13 cw(c46.688,20.13) 46.363,20.455 ; P5.1@49.597,20.895 ccw(c48.534,19.832) 48.534,21.336 ccw(c48.534,22.84) P5.1@49.597,21.777 ; P5.1@49.777,21.075 ccw(c49.147,20.445) 49.147,21.336 ccw(c49.147,22.227) P5.1@49.777,21.597 ; P5.1 48.26,21.336 47.498,20.574 ; 46.482,20.574 47.498,20.574
pads on no net: U1.6 U2.3 U2.4 U2.5 U2.6 U2.7 U3.9 U6.1 U6.2 U6.5 U6.6 U6.16 U6.17 U6.18 U6.19

## Polygon pours and split planes (outlines as drawn)
GND on Bottom Layer "Bottom Layer-No Net" (solid, pour order 14): 0.254,38.862 52.07,38.862 52.07,0 0.254,0 0.254,38.862
GND on Top Layer "Bottom Layer-No Net" (solid, pour order 16): 0.254,38.862 52.07,38.862 52.07,0 0.254,0 0.254,38.862

## Keep-outs
Keep-Out Layer:
  lines w0.254: 0.254,0 52.07,0 52.07,38.862 0.254,38.862 0.254,0

## Silkscreen, mask and mechanical layers (free items; w line width, h text height)
Top Overlay:
  text "3V3" at 19.812,29.718 h1.52
  text "temp1" at 47.498,29.464 h1.02 r270
  text "SWI" at 19.558,27.178 h1.52
  text "GND" at 19.558,24.384 h1.52
  text "temp2" at 47.244,22.606 h1.02 r270
  text "RST" at 19.812,21.59 h1.52
  text "hot" at 47.244,14.478 h1.02 r270